# Altium PCB Therm_Expand_PCB.PcbDoc (part 1 of 2)
Units mm, origin at the board's own origin, x right, y up, seen from the top; angles counter-clockwise.
Board outline 68.45 x 50.23 mm, 2 copper layers (Top Layer, Bottom Layer); 54 components, 69 nets, 242 pads, 159 vias.
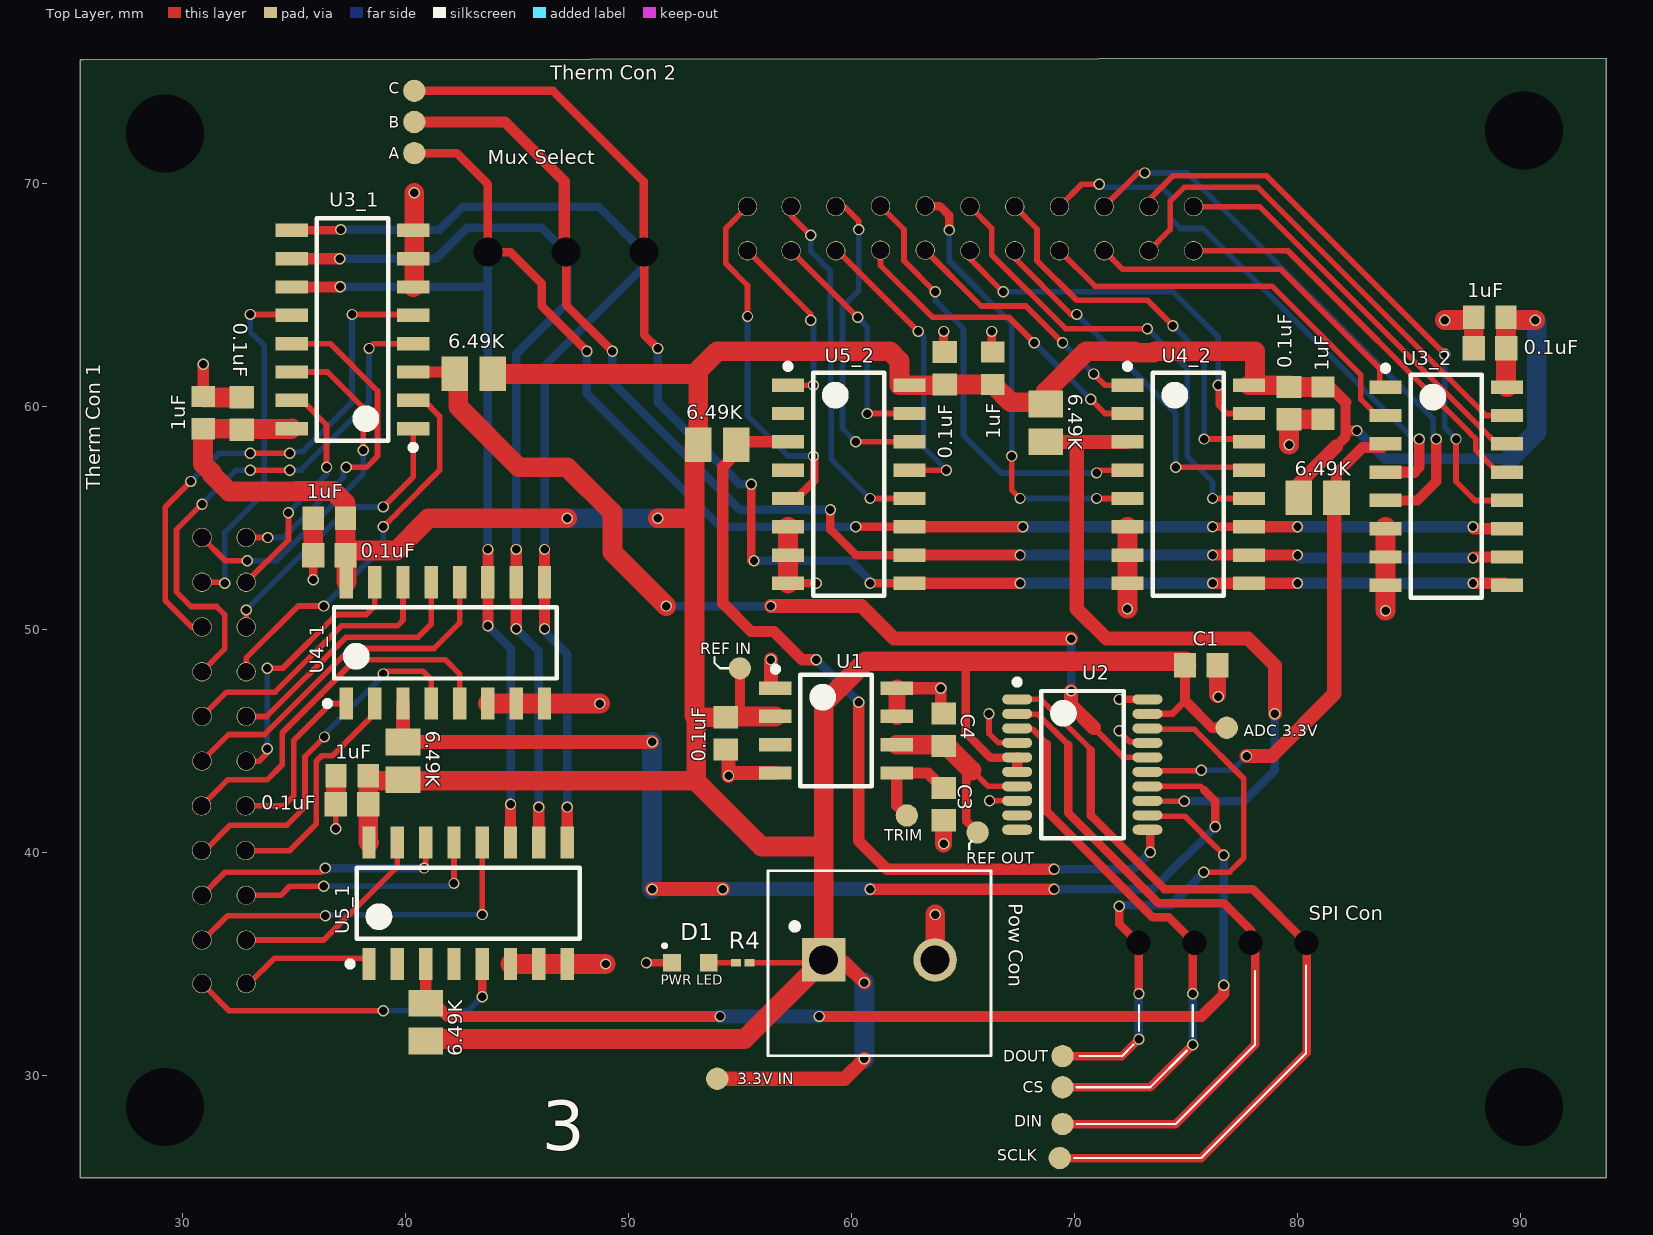
[diagram p0: Top Layer view]
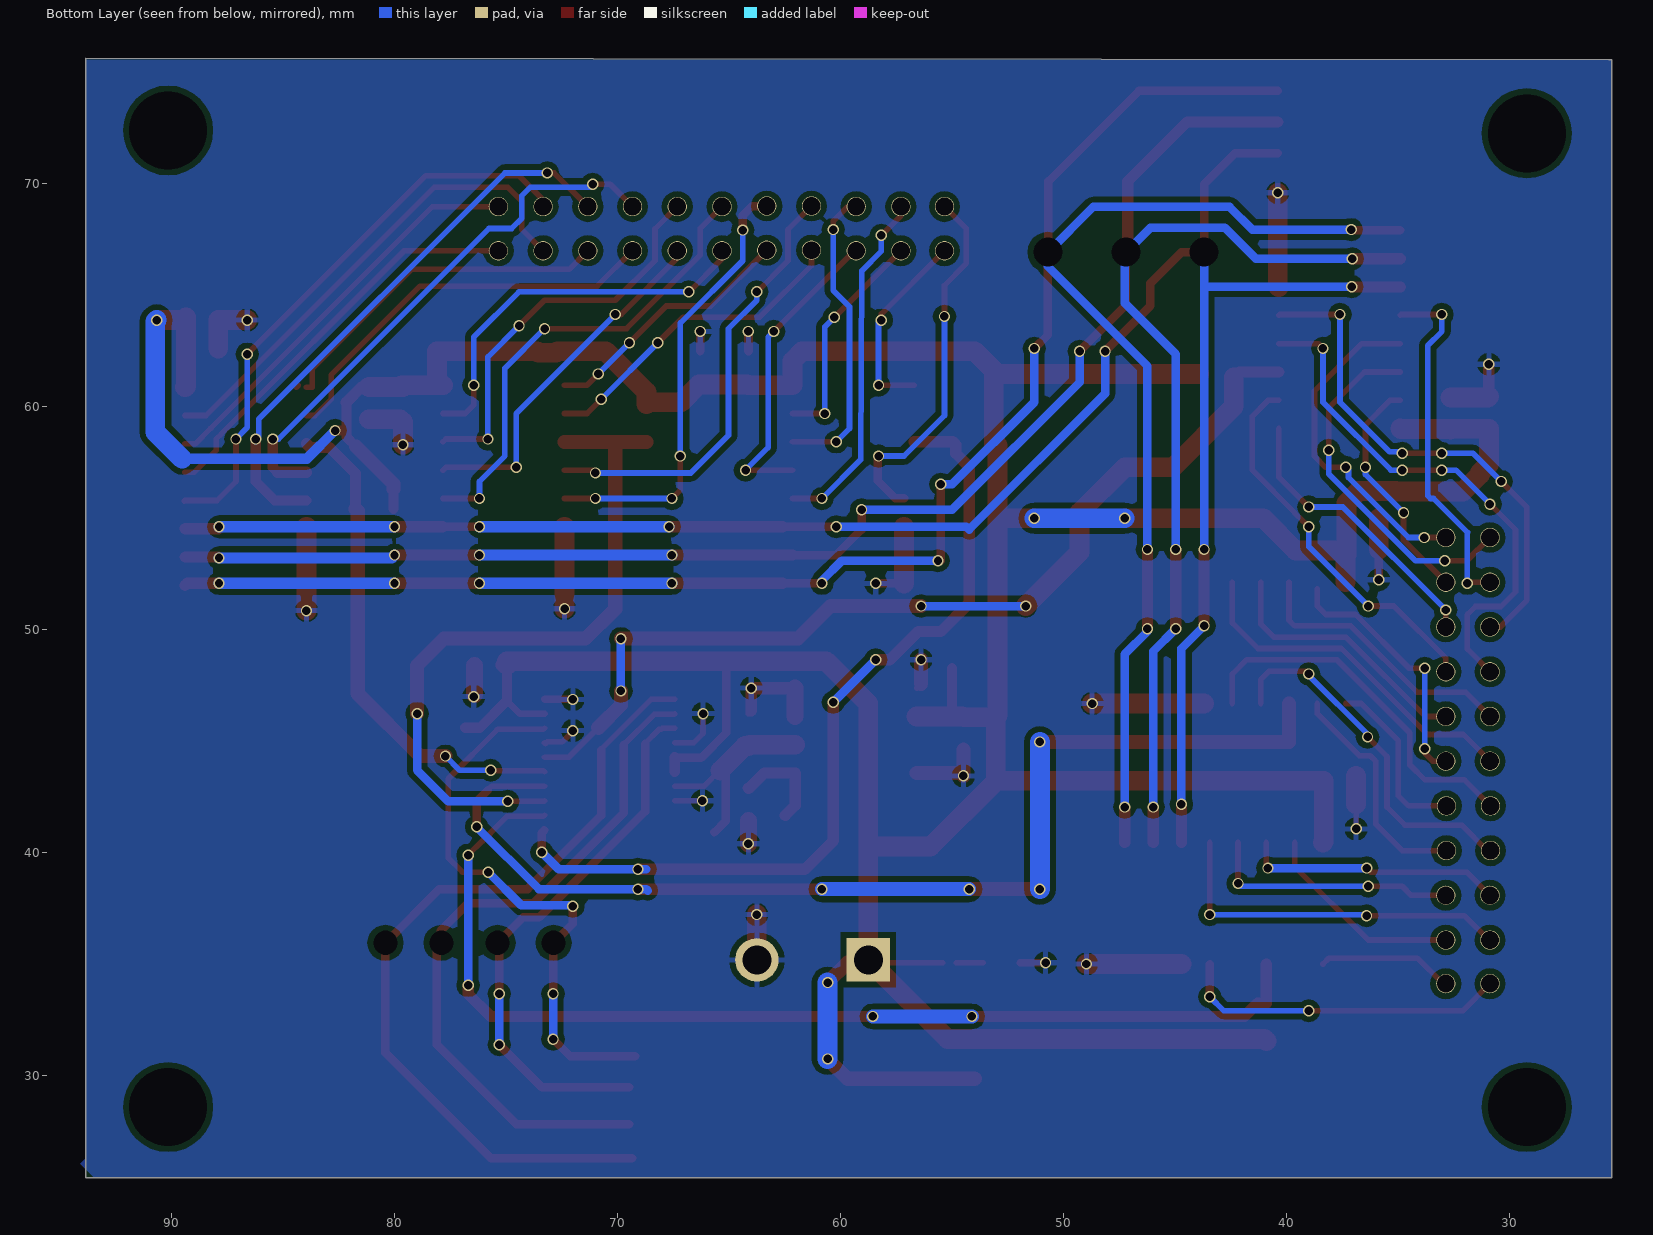
[diagram p1: Bottom Layer view, seen from below]

## Layer stack, top to bottom
Top Solder: solder mask 0.0102, Solder Resist, Dk 3.5
Top Layer: signal copper 0.0356
Dielectric 1: dielectric 0.32, FR-4, Dk 4.8
Bottom Layer: signal copper 0.0356
Bottom Solder: solder mask 0.0102, Solder Resist, Dk 3.5

## Board outline
25.527,75.565 93.853,75.629 93.853,25.4 25.4,25.4 25.4,75.565 25.527,75.565 25.4,75.565

## Design rules (kind name [scope] priority, off if disabled: settings)
Clearance [All] p1: gap=0.254 ignorepadtopadclearanceinfootprint=FALSE except(0: Arc-Hole Track-Hole SMDPad-Hole THPad-Hole Via-Hole Fill-Hole Poly-Hole Region-Hole Text-Hole; 0.127: SMDPad-SMDPad)
PolygonConnect [All] p1: connectstyle=Relief reliefconductorwidth=0.254 reliefentries=4 polygonreliefangle="90 Angle" airgapwidth=0.254
RoutingVias [All] p1: holewidth=0.381 width=0.508 viastyle="Through Hole" minholewidth=0.305 minwidth=0.457 maxholewidth=0.711 maxwidth=0.813
SolderMaskExpansion [All] p1: expansion=0.102
Width [All] p1: maxlimit=1.27 minlimit=0.152 preferedwidth=0.381 minimp=50.000000 maximp=50.000000 favimp=50.000000
30 further rules are at their usual default settings.

## Classes and differential pairs
net class ADC_OUTC[1..2]: ADC_OUTC1 ADC_OUTC2
net class ADC_OUTB[1..2]: ADC_OUTB1 ADC_OUTB2
channel class Multiplexers: Data_TransferA_U_Single_Mux1 Data_TransferB_U_Single_Mux2
channel class MID: Data_Transfer1 Data_Transfer2
channel class 50Pin_Connector: Data_TransferA_U_AHK50H-ND_THERM_CONNECTOR1 Data_TransferB_U_AHK50H-ND_THERM_CONNECTOR2
net class ADC_OUTA[1..2]: ADC_OUTA1 ADC_OUTA2
component class Data_TransferB_U_Single_Mux2: C5_2 C6_2 C7_2 C8_2 C9_2 C10_2 R1_2 R2_2 R3_2 TP11 U3_2 U4_2 U5_2
component class Data_TransferA_U_Single_Mux1: A B C C5_1 C6_1 C7_1 C8_1 C9_1 C10_1 "Mux Select" R1_1 R2_1 R3_1 U3_1 U4_1 U5_1
component class U_Data_Conversion: 0.1uF "3.3V IN" "ADC 3.3V" C1 C3 C4 CS D1 DIN DOUT "Pow Con" R4 "REF IN" "REF OUT" S1 S2 S3 S4 SCLK "SPI Con" TRIM U1 U2
component class Data_TransferB_U_AHK50H-ND_THERM_CONNECTOR2: "Therm Con 2"
component class Data_TransferA_U_AHK50H-ND_THERM_CONNECTOR1: "Therm Con 1"

## Components (designator, comment, footprint, x,y, rotation, side; value= is the part's Value field where it differs from the comment)
0.1uF "0.1uF" 0.1UF_KEMET 64.186,61.722 r270 top (schematic designator C9)
0.1uF "0.1uF" 0.1UF_KEMET 37.592,42.164 r0 top (schematic designator C9)
0.1uF "0.1uF" 0.1UF_KEMET 79.629,60.159 r90 top (schematic designator C7)
0.1uF "0.1uF" 0.1UF_KEMET 36.576,53.34 r0 top (schematic designator C7)
0.1uF "0.1uF" 0.1UF_KEMET 88.646,62.611 r0 top (schematic designator C5)
0.1uF "0.1uF" 0.1UF_KEMET 32.639,59.69 r270 top (schematic designator C5)
0.1uF "0.1uF Cap" 0.1UF_KEMET 54.356,45.339 r90 top (schematic designator C2)
1uF "1uF" 1UF_SAMSUNG 66.345,61.722 r270 top (schematic designator C10)
1uF "1uF" 1UF_SAMSUNG 37.592,43.434 r0 top (schematic designator C10)
1uF "1uF" 1UF_SAMSUNG 81.153,60.159 r90 top (schematic designator C8)
1uF "1uF" 1UF_SAMSUNG 36.576,54.991 r0 top (schematic designator C8)
1uF "1uF" 1UF_SAMSUNG 88.646,64.008 r0 top (schematic designator C6)
1uF "1uF" 1UF_SAMSUNG 30.912,59.729 r270 top (schematic designator C6)
"3.3V IN" "Test Point" "TEST POINT"#1 111.125,27.686 r90 top locked (schematic designator TP9)
6.49K "6.49kOhm SMD Resistor" RESC2012X06N 53.975,58.293 r180 top (schematic designator R3)
6.49K "6.49kOhm SMD Resistor" RESC2012X06N 40.894,32.385 r270 top (schematic designator R3)
6.49K "6.49kOhm SMD Resistor" RESC2012X06N 68.707,59.27 r90 top (schematic designator R2)
6.49K "6.49kOhm SMD Resistor" RESC2012X06N 39.878,44.108 r270 top (schematic designator R2)
6.49K "6.49kOhm SMD Resistor" RESC2012X06N 80.911,55.919 r180 top (schematic designator R1)
6.49K "6.49kOhm SMD Resistor" RESC2012X06N 43.053,61.468 r0 top (schematic designator R1)
A "Test Point" "TEST POINT"#2 153.67,33.02 r90 top locked (schematic designator TP15)
"ADC 3.3V" "Test Point" "TEST POINT"#3 122.809,27.686 r90 top locked (schematic designator TP7)
B "Test Point" "TEST POINT"#2 144.272,33.401 r90 top locked (schematic designator TP14)
C "Test Point" "TEST POINT"#2 134.366,33.02 r90 top (schematic designator TP13)
C1 "0.1uF Cap" 0.1UF_KEMET 75.692,48.387 r180 top
C3 "0.1uF Cap" 0.1UF_KEMET 64.135,42.164 r270 top
C4 "0.1uF Cap" 0.1UF_KEMET 64.135,45.503 r270 top
CS "Test Point" "TEST POINT"#4 152.019,27.686 r90 top locked (schematic designator TP2)
D1 "LED" GREEN_SMD_LED 43.155,36.678 r0 top
DIN "Test Point" "TEST POINT"#5 146.177,27.686 r90 top locked (schematic designator TP3)
DOUT "Test Point" "TEST POINT"#6 157.861,27.686 r90 top locked (schematic designator TP1)
"Mux Select" "Mux_Sel" 3-SCREW-TERMINAL-MUX-SELECT 51.562,66.396 r180 top (schematic designator P4)
"Pow Con" "PCB_Power_Connector" POWER_CONNECTOR 38.394,32.258 r0 top (schematic designator P1)
R4 "Green_LED_Res" GREEN_LED_RES 55.118,35.052 r180 top
"REF IN" "Test Point" "TEST POINT"#7 140.335,27.686 r90 top locked (schematic designator TP5)
"REF OUT" "Test Point" "TEST POINT"#8 128.651,27.686 r90 top locked (schematic designator TP6)
S1 "#6-32 Standoff" "#6-32 STAND OFF" 100.432,103.048 r0 top
S2 "#6-32 Standoff" "#6-32 STAND OFF" 39.472,102.921 r0 top
S3 "#6-32 Standoff" "#6-32 STAND OFF" 39.472,59.233 r0 top
S4 "#6-32 Standoff" "#6-32 STAND OFF" 100.432,59.233 r0 top
SCLK "Test Point" "TEST POINT"#9 134.493,27.686 r90 top locked (schematic designator TP4)
"SPI Con" "2.54MM MUX SEL CON" "4POS 2.54MM HEADER MUX SEL" 80.518,34.036 r180 top (schematic designator P3)
"Therm Con 1" "22-Pin-Connector" "22-PIN CONENCTOR" 375.336,384.759 r90 top (schematic designator P2)
"Therm Con 2" "22-Pin-Connector" "22-PIN CONENCTOR" 405.982,-275.499 r0 top (schematic designator P2)
TP19 "Test Point" "TEST POINT"#10 80.645,39.878 r90 top locked
TRIM "Test Point" "TEST POINT"#11 116.967,27.686 r90 top locked (schematic designator TP8)
U1 "8Pin_ADC_REF_V" SOIC127P600X175-8N 59.309,45.466 r0 top
U2 "8Bit-ADC" 8BIT-8CH-SAR-ADC 70.358,43.942 r0 top
U3_1 "8:1 - MUX" SOP127P600X175 37.61,63.461 r180 top (schematic designator U3)
U3_2 "8:1 - MUX" SOP127P600X175 86.684,56.427 r0 top (schematic designator U3)
U4_1 "8:1 - MUX" SOP127P600X175 41.783,49.403 r90 top (schematic designator U4)
U4_2 "8:1 - MUX" SOP127P600X175 75.108,56.515 r0 top (schematic designator U4)
U5_1 "8:1 - MUX" SOP127P600X175 42.799,37.719 r90 top (schematic designator U5)
U5_2 "8:1 - MUX" SOP127P600X175 59.875,56.515 r0 top (schematic designator U5)

## Footprints (in the part's own frame and the unit in brackets; to place one, negate y for a bottom-side part, rotate by r counter-clockwise, add the part's x,y. Pads: shape width x height; smd on the part's side, far side on the other; paste and mask are expansions set on the pad)
0.1UF_KEMET [mm]
  rect 1x1.1 smd: 1(-0.725,0) 2(0.725,0)
  body extent -0.87,-0.48 0.87,0.48, height 0.92
1UF_SAMSUNG [mm]
  rect 0.95x1.05 smd: 1(-0.725,0) 2(0.725,0)
  body extent -0.85,-0.45 0.85,0.45, height 0.9
3-SCREW-TERMINAL-MUX-SELECT [mm]
  round 0.8 hole 1.3: 1(0.864,-0.533) 2(4.369,-0.533) 3(7.874,-0.533)
  body extent -1.43,-4.08 10.07,2.92, height 8.5
"4POS 2.54MM HEADER MUX SEL" [mm]
  round 0.8 hole 1.09: 1(0.102,-1.905) 2(2.616,-1.905) 3(5.131,-1.905) 4(7.645,-1.905)
  body extent -2.44,-2.64 10.26,10.95, height 7.06
8BIT-8CH-SAR-ADC [mm]
  oval 1.35x0.45 smd: 1(-2.925,2.925) 2(-2.925,2.275) 3(-2.925,1.625) 4(-2.925,0.975) 5(-2.925,0.325) 6(-2.925,-0.325) 7(-2.925,-0.975) 8(-2.925,-1.625) 9(-2.925,-2.275) 10(-2.925,-2.925) 11(2.925,-2.925) 12(2.925,-2.275) 13(2.925,-1.625) 14(2.925,-0.975) 15(2.925,-0.325) 16(2.925,0.325) 17(2.925,0.975) 18(2.925,1.625) 19(2.925,2.275) 20(2.925,2.925)
  silkscreen extent -3.05,-3.3 1.85,3.82, body extent -3.2,-3.3 3.2,3.3, height 1.25
"22-PIN CONENCTOR" [mil]
  round 34 hole 31.5: 1(-13017,13484) 2(-13017,13562) 3(-13096,13484) 4(-13096,13562) 5(-13175,13484) 6(-13175,13562) 7(-13254,13484) 8(-13254,13562) 9(-13333,13484) 10(-13333,13562) 11(-13412,13484) 12(-13412,13562) 13(-13491,13485) 14(-13491,13563) 15(-13570,13485) 16(-13570,13563) 17(-13649,13484) 18(-13649,13562) 19(-13728,13484) 20(-13728,13562) 22(-13805,13562) 51(-13805,13484)
  body extent -13883,13472 -12939,13866, height 199
"#6-32 STAND OFF" [mm]
  round 0.8 hole 3.5: 1(-10.262,-30.658)
  body extent -13.92,-33.83 -6.6,-27.48, height 10.32
GREEN_LED_RES [mm] "Chip Resistor, 2-Leads, Body 0.60x0.30mm, IPC Medium Density"
  rect 0.45x0.35 smd: 1(-0.3,0) 2(0.3,0)
  body extent -0.32,-0.17 0.32,0.17, height 0.26
GREEN_SMD_LED [mm]
  rect 0.8x0.8 smd: 1(8.788,-1.626) 2(10.439,-1.626)
  silkscreen extent 8.43,-0.89 8.48,-0.84, body extent 8.79,-2.02 10.41,-1.23, height 0.71
POWER_CONNECTOR [mm]
  rect 1.95x1.95 hole 1.3: 1(20.36,2.921)
  round 1.95 hole 1.3: 2(25.36,2.921)
  silkscreen extent 17.86,-1.38 27.86,6.92, body extent 17.89,-2.13 28.29,6.87, height 11.41
RESC2012X06N [mm] "Chip Resistor, 2-Leads, Body 2.00x1.25mm, IPC Medium Density"
  rect 1.2x1.55 smd: 1(-0.85,0) 2(0.85,0)
  body extent -1.1,-0.58 1.1,0.58, height 0.6
SOIC127P600X175-8N [mm] "SOIC, 8-Leads, Body 4.90x3.90mm, Pitch 1.27mm, IPC Medium Density"
  rect 1.45x0.6 smd: 1(-2.725,1.905) 2(-2.725,0.635) 3(-2.725,-0.635) 4(-2.725,-1.905) 5(2.725,-1.905) 6(2.725,-0.635) 7(2.725,0.635) 8(2.725,1.905)
  silkscreen extent -2.85,-2.5 1.6,2.88, body extent -3,-2.5 3,2.5, height 1.75
SOP127P600X175 [mm] "SOP, 16-Leads, Body 9.90x3.90mm, Pitch 1.27mm, IPC Medium Density"
  rect 1.45x0.6 smd: 1(-2.725,4.445) 2(-2.725,3.175) 3(-2.725,1.905) 4(-2.725,0.635) 5(-2.725,-0.635) 6(-2.725,-1.905) 7(-2.725,-3.175) 8(-2.725,-4.445) 9(2.725,-4.445) 10(2.725,-3.175) 11(2.725,-1.905) 12(2.725,-0.635) 13(2.725,0.635) 14(2.725,1.905) 15(2.725,3.175) 16(2.725,4.445)
  silkscreen extent -2.85,-5 1.6,5.42, body extent -3,-5 3,5, height 1.75
"TEST POINT"#1 [mm]
  round 1 smd: 1(2.159,57.15)
"TEST POINT"#2 [mm]
"TEST POINT"#3 [mm]
  round 1 smd: 1(17.907,45.974)
"TEST POINT"#4 [mm]
  round 1 smd: 1(1.778,82.55)
"TEST POINT"#5 [mm]
  round 1 smd: 1(0.127,76.708)
"TEST POINT"#6 [mm]
  round 1 smd: 1(3.175,88.392)
"TEST POINT"#7 [mm]
  round 1 smd: 1(20.574,85.344)
"TEST POINT"#8 [mm]
  round 1 smd: 1(13.208,62.992)
"TEST POINT"#9 [mm]
  round 1 smd: 1(-1.397,65.151)
"TEST POINT"#10 [mm]
  round 1 on Top Solder: 1(0,0)
"TEST POINT"#11 [mm]
  round 1 smd: 1(13.97,54.483)

## Part data
0.1uF 0.1uF 0.1uF 0.1uF 0.1uF 0.1uF: library part "0.1uF Cap", "C0603C101K8GAC7867 Kemet Capacitor", Supplier Part Number 1=399-14477-1-ND, Supplier 1=Digi-Key
0.1uF C1 C3 C4: "C0603C101K8GAC7867 Kemet Capacitor", Supplier Part Number 1=399-14477-1-ND, Supplier 1=Digi-Key
1uF 1uF 1uF 1uF 1uF 1uF: library part "1uF Samsung Cap", "1uF Samsung Cap", Supplier Part Number 1=1276-1946-1-ND, Supplier 1=Digi-Key
6.49K 6.49K 6.49K 6.49K 6.49K 6.49K: Case/Package=0805, Case Code (Metric)=2012, Manufacturer=Panasonic, Manufacturer Part Number=ERA6AEB6491V, Max Operating Temperature=155°C, Max Power Dissipation=125mW, Min Operating Temperature=-55°C, Package Quantity=1, Resistance=6.49K, Supplier Part Number 1=P6.49KDACT-ND, Temperature Coefficient=25ppm/°C, Tolerance=0.1%, Voltage Rating=100V, Case Code (Imperial)=0805, ComponentLink1Description=http://www.farnell.com/datasheets/485442.pdf?src-supplier=Farnell, ComponentLink1URL=http://www.farnell.com/datasheets/485442.pdf?src-supplier=Farnell, ComponentLink2Description=http://www.mouser.com/ds/2/315/AOA0000CE26-32660.pdf?src-supplier=Mouser, ComponentLink2URL=http://www.mouser.com/ds/2/315/AOA0000CE26-32660.pdf?src-supplier=Mouser, ComponentLink3Description=http://www.farnell.com/datasheets/2059650.pdf?src-supplier=Farnell, ComponentLink3URL=http://www.farnell.com/datasheets/2059650.pdf?src-supplier=Farnell, ComponentLink4Description=http://uk.rs-online.com/webdocs/0eb1/0900766b80eb1d8c.pdf?src-supplier=RSComponents, ComponentLink4URL=http://uk.rs-online.com/webdocs/0eb1/0900766b80eb1d8c.pdf?src-supplier=RSComponents, ComponentLink5Description=http://www.farnell.com/datasheets/485442.pdf?src-supplier=Element14, ComponentLink5URL=http://www.farnell.com/datasheets/485442.pdf?src-supplier=Element14, ComponentLink6Description=http://www.produktinfo.conrad.com/datenblaetter/1100000-1199999/001181295-da-01-en-WIDERSTAND_ERA_0805_6K49_0_1__5000ST.pdf?src-supplier=Conrad, ComponentLink6URL=http://www.produktinfo.conrad.com/datenblaetter/1100000-1199999/001181295-da-01-en-WIDERSTAND_ERA_0805_6K49_0_1__5000ST.pdf?src-supplier=Conrad, Composition="Thin Film,Metal Film", Contact Plating=Tin, Depth=1.25mm, Features="Automotive AEC-Q200", Height=0.5mm, Lead Free="Lead Free", Length=2mm, Military Standard=Not, Mount="Surface Mount", Number of Pins=2, Number of Terminations=2, Packaging="Tape and Reel", Power Rating=125mW, Pricing 1="1=0.36, 10=0.302, 100=0.1182, 1000=0.0495, 2500=0.0454 (USD)", Radiation Hardening=No, REACH SVHC="No SVHC", Stock 1=15147, Supplier 1=Digi-Key, Termination=SMD/SMT, Voltage Rating (DC)=100V, Width=1.25mm
D1: library part GREEN_LED, Case/Package=0603, Case Code (Metric)=1608, Color=Green, Forward Current=20mA, Forward Voltage=2V, Lens Color=Colorless,Clear, Manufacturer=Dialight, Manufacturer Part Number=5988070107F, Max Operating Temperature=100°C, Min Operating Temperature=-30°C, Package Quantity=4000, Power Dissipation=60mW, Reverse Voltage=5V, Supplier Part Number 1=350-2035-1-ND, Case Code (Imperial)=0603, ComponentLink1Description=http://www.mouser.com/ds/2/109/SMT_selector_guide-267443.pdf?src-supplier=Mouser, ComponentLink1URL=http://www.mouser.com/ds/2/109/SMT_selector_guide-267443.pdf?src-supplier=Mouser, ComponentLink2Description=http://uk.rs-online.com/webdocs/0ae2/0900766b80ae2975.pdf?src-supplier=RSComponents, ComponentLink2URL=http://uk.rs-online.com/webdocs/0ae2/0900766b80ae2975.pdf?src-supplier=RSComponents, ComponentLink3Description=http://www.farnell.com/datasheets/1720200.pdf?src-supplier=Element14, ComponentLink3URL=http://www.farnell.com/datasheets/1720200.pdf?src-supplier=Element14, ComponentLink4Description=https://media.digikey.com/pdf/Data%20Sheets/Dialight%20PDFs/598_Series_0603_Pkg.pdf?src-supplier=Digi-Key, ComponentLink4URL=https://media.digikey.com/pdf/Data%20Sheets/Dialight%20PDFs/598_Series_0603_Pkg.pdf?src-supplier=Digi-Key, ComponentLink5Description=http://www.farnell.com/datasheets/1484480.pdf?src-supplier=Element14, ComponentLink5URL=http://www.farnell.com/datasheets/1484480.pdf?src-supplier=Element14, ComponentLink6Description=https://www.alliedelec.com/m/d/745256ca487aea7b70ea31e2d673d5bb.pdf?src-supplier=Allied+Electronics, ComponentLink6URL=https://www.alliedelec.com/m/d/745256ca487aea7b70ea31e2d673d5bb.pdf?src-supplier=Allied+Electronics, ComponentLink7Description=http://www.onlinecomponents.com/productFiles/mf-DIA/mdei5980603.pdf?src-supplier=Onlinecomponents.com, ComponentLink7URL=http://www.onlinecomponents.com/productFiles/mf-DIA/mdei5980603.pdf?src-supplier=Onlinecomponents.com, ComponentLink8Description=https://www.verical.com/server-webapp/html/getDatasheet?partID=146438&src-supplier=Verical, ComponentLink8URL=https://www.verical.com/server-webapp/html/getDatasheet?partID=146438&src-supplier=Verical, ComponentLink9Description=http://www.dialight.com/Assets/Brochures_And_Catalogs/Indication/SMT_selector_guide.pdf?src-supplier=Future+Electronics, ComponentLink9URL=http://www.dialight.com/Assets/Brochures_And_Catalogs/Indication/SMT_selector_guide.pdf?src-supplier=Future+Electronics, Depth=0.8mm, Dominant Wavelength=568nm, Height=0.7mm, Illumination Color=Green, Lead Free="Lead Free", Length=1.6mm, Lens Size=0.8mm, Lens Style=Flat,Rectangular,Diffused,Colorless,Clear, Lens Transparency=Clear, Luminous Intensity=20mcd, Mount="Surface Mount", Number of Elements=1, Number of LEDs=1, Number of Pins=2, Packaging="Tape and Reel", Pricing 1="1=0.46, 10=0.33, 25=0.2528, 100=0.1648, 250=0.1209, 500=0.1026, 1000=0.0843 (USD)", Radiation Hardening=No, REACH SVHC="No SVHC", Stock 1=228546, Supplier 1=Digi-Key, Test Current=20mA, Viewing Angle=140°, Wavelength=570nm, Width=0.8mm
"Mux Select": library part 3-Screw-Terminal-Mux-Select, "Mux Select", Color=Blue, Current Rating=10A, Manufacturer="Wurth Electronics", Manufacturer Part Number=691103110003, Supplier Part Number 1=732-2746-ND, Voltage Rating=125V, ComponentLink1Description=http://www.farnell.com/datasheets/1442217.pdf?src-supplier=Element14, ComponentLink1URL=http://www.farnell.com/datasheets/1442217.pdf?src-supplier=Element14, Contact Material=Brass, Height=12.2mm, Housing Material=Nylon, Length=7mm, Number of Contacts=3, Number of Levels=1, Number of Positions Per Level=3, Pitch=0.138inch, Pricing 1="1=1.1, 10=0.986, 50=0.851, 100=0.762, 500=0.717, 980=0.672 (USD)", REACH SVHC=Unknown, Stock 1=617, Stripping Length=-6mm, Supplier 1=Digi-Key, Termination=Screw, Width=11.5mm, Wire/Cable Gauge=26AWG
"Pow Con": Color=Green, Current=18A, Current Rating=17.5A, Flammability Rating="UL94 V-0", Manufacturer="Phoenix Contact", Manufacturer Part Number=PT1,5/2-5.0-H, Max Current Rating=16A, Max Supply Voltage=250V, Package Quantity=250, Supplier Part Number 1=277-1667-ND, Voltage=300V, Voltage Rating (DC)=320V, Approvals=UL, ComponentLink1Description=https://media.digikey.com/pdf/Data%20Sheets/Phoenix%20Contact%20PDFs/1935161.pdf, ComponentLink1URL=https://media.digikey.com/pdf/Data%20Sheets/Phoenix%20Contact%20PDFs/1935161.pdf, ComponentLink2Description=https://www.verical.com/server-webapp/html/getDatasheet?partID=177903, ComponentLink2URL=https://www.verical.com/server-webapp/html/getDatasheet?partID=177903, Connector Type=Screw, Contact Material=Copper,Tin, Depth=9mm, Height=11.3mm, Housing Color=Green, Housing Material=Polyamide, Insulation Material=Nylon, Lead Free="Lead Free", Length=9mm, Material=Nylon, Mount="Through Hole", Number of Circuits=2, Number of Contacts=2, Number of Levels=1, Number of Pins=2, Number of Poles=2, Number of Positions=2, Number of Positions Per Level=2, Number of Rows=1, Orientation=Straight, Packaging=Bulk, Pitch=5mm, Pricing 1="1=0.43, 10=0.411, 50=0.3928, 100=0.382, 250=0.357, 500=0.3284, 1000=0.3035 (USD)", Radiation Hardening=No, Stock 1=104404, Supplier 1=Digi-Key, Termination=Solder, Voltage Rating=250V, Weight=0.067021oz, Width=14.9mm, Wire/Cable Gauge=14AWG, Wire Gauge (Max)=26AWG, Wire Gauge (Min)=12AWG
R4: Case/Package=0201, Case Code (Metric)=0603, Manufacturer=Panasonic, Manufacturer Part Number=ERJ-1GNF90R9C, Max Operating Temperature=125°C, Max Power Dissipation=50mW, Min Operating Temperature=-55°C, Package Quantity=15000, Resistance=90.9R, Supplier Part Number 1=P123198CT-ND, Temperature Coefficient=200ppm/°C, Tolerance=1%, Voltage Rating=25V, Case Code (Imperial)=0201, Composition="Thick Film", Contact Plating=Tin,Matte, Height=0.01inch, Length=0.024inch, Mount="Surface Mount", Number of Terminations=2, Packaging="Tape and Reel", Power Rating=50mW, Pricing 1="1=0.1, 10=0.058, 100=0.0235, 1000=0.0105, 2500=0.0092, 5000=0.0076 (USD)", Radiation Hardening=No, Stock 1=52857, Supplier 1=Digi-Key, Termination=SMD/SMT, Width=0.3mm
S1 S2 S3 S4: Manufacturer=RAF, Manufacturer Part Number=2102T-632-AL-7, Package Quantity=100, Supplier Part Number 1=1772-1144-ND, Pricing 1="1=0.5, 25=0.3328, 100=0.2834, 250=0.2692, 500=0.2551, 1000=0.2409 (USD)", Stock 1=1687, Supplier 1=Digi-Key
"SPI Con": Color=Black, Contact Resistance=30mR, Current Rating=3A, Flammability Rating="UL94 V-0", Insulation Resistance=1GR, Manufacturer=Molex, Manufacturer Part Number=0705530108, Max Operating Temperature=105°C, Min Operating Temperature=-40°C, Package Quantity=1680, Supplier Part Number 1=WM4155-ND, Voltage Rating=250V, ComponentLink1Description=https://www.molex.com/pdm_docs/ps/PS-70400.pdf?src-supplier=Digi-Key, ComponentLink1URL=https://www.molex.com/pdm_docs/ps/PS-70400.pdf?src-supplier=Digi-Key, ComponentLink2Description=http://www.molex.com/webdocs/datasheets/pdf/en-us/0705530108_PCB_HEADERS.pdf?src-supplier=Avnet+Asia, ComponentLink2URL=http://www.molex.com/webdocs/datasheets/pdf/en-us/0705530108_PCB_HEADERS.pdf?src-supplier=Avnet+Asia, ComponentLink3Description=http://www.farnell.com/datasheets/2027073.pdf?src-supplier=Element14, ComponentLink3URL=http://www.farnell.com/datasheets/2027073.pdf?src-supplier=Element14, ComponentLink4Description=http://www.molex.com/webdocs/datasheets/pdf/en-us/0705530108_PCB_HEADERS.pdf?src-supplier=Avnet, ComponentLink4URL=http://www.molex.com/webdocs/datasheets/pdf/en-us/0705530108_PCB_HEADERS.pdf?src-supplier=Avnet, ComponentLink5Description=http://www.mouser.com/ds/2/276/0705530108_PCB_HEADERS-172949.pdf?src-supplier=Mouser, ComponentLink5URL=http://www.mouser.com/ds/2/276/0705530108_PCB_HEADERS-172949.pdf?src-supplier=Mouser, Connector Type="Male Pin", Contact Material=Bronze, Contact Mating Length=0.24inch, Contact Plating=Gold, Depth=13.59mm, ELV=Compliant, Fastening Type=Latch, Gender=Male, Glow Wire Compliant=Non-compliant, Housing Color=Black, Housing Material=Polyester, Length=12.71mm, Material=Brass, Mount="Through Hole", Number of Circuits=4, Number of Contacts=4, Number of Positions=4, Number of Rows=1, Orientation="Right Angle", Packaging=Rail/Tube, Pitch=0.1inch, Pricing 1="1=2.03, 10=1.838, 100=1.575, 500=1.3125, 1680=1.0875, 5040=0.9975, 10080=0.975 (USD)", Radiation Hardening=No, REACH SVHC=Unknown, Stock 1=1281, Supplier 1=Digi-Key, Termination=Solder, Voltage Rating (DC)=250V
"Therm Con 1" "Therm Con 2": Color=Black, Contact Resistance=30mR, Current Rating=2A, Manufacturer=Hirose, Manufacturer Part Number=DF11-22DP-2DS(24), Max Operating Temperature=85°C, Min Operating Temperature=-30°C, Package Quantity=20, Supplier Part Number 1=H10253-ND, Voltage Rating=250V, ComponentLink1Description=http://docs-usa.electrocomponents.com/techlib:/itc_doclist_US.htm?stockno=6888963&src-supplier=Allied+Electronics, ComponentLink1URL=http://docs-usa.electrocomponents.com/techlib:/itc_doclist_US.htm?stockno=6888963&src-supplier=Allied+Electronics, ComponentLink2Description=https://www.verical.com/server-webapp/html/getDatasheet?partID=456315&src-supplier=Verical, ComponentLink2URL=https://www.verical.com/server-webapp/html/getDatasheet?partID=456315&src-supplier=Verical, ComponentLink3Description=http://www.hirose.co.jp/cataloge_hp/en_DF11_20130411.pdf?src-supplier=Future+Electronics, ComponentLink3URL=http://www.hirose.co.jp/cataloge_hp/en_DF11_20130411.pdf?src-supplier=Future+Electronics, ComponentLink4Description=http://www.farnell.com/datasheets/91550.pdf?src-supplier=Element14, ComponentLink4URL=http://www.farnell.com/datasheets/91550.pdf?src-supplier=Element14, ComponentLink5Description=http://www.mouser.com/ds/2/185/DF11_catalog-1064296.pdf?src-supplier=Mouser, ComponentLink5URL=http://www.mouser.com/ds/2/185/DF11_catalog-1064296.pdf?src-supplier=Mouser, ComponentLink6Description=http://documents.rs-components.com/techlib://itc_doclist_GB.htm?stockno=6056598&src-supplier=RSComponents, ComponentLink6URL=http://documents.rs-components.com/techlib://itc_doclist_GB.htm?stockno=6056598&src-supplier=RSComponents, Connector Type="Male Pin", Contact Material="Brass,Copper Alloy,Tin", Contact Mating Length=0.118inch, Contact Plating=Tin, Depth=10mm, Fastening Type=Detent, Gender=Male, Height=5mm, Housing Color=Black, Housing Material=Polyamide, Lead Free="Lead Free", Length=24mm, Max Current Rating=2A, Mount="Through Hole", Number of Contacts=22, Number of Positions=22, Number of Rows=2, Orientation="Right Angle", Packaging=Rail/Tube, Pitch=2mm, Pricing 1="1=1.19, 20=1.0455, 100=0.902, 500=0.738, 1000=0.656 (USD)", Radiation Hardening=No, Row Spacing=0.079inch, Stock 1=536, Supplier 1=Digi-Key, Termination=Solder
U1: Case/Package=D, Manufacturer="Texas Instruments", Manufacturer Part Number=REF5025AQDRQ1, Max Input Voltage=18V, Max Operating Temperature=125°C, Max Output Current=10mA, Max Output Voltage=2.5V, Min Input Voltage=2.7V, Min Operating Temperature=-40°C, Nominal Supply Current=800uA, Operating Supply Current=1.2mA, Package Quantity=1, Supplier Part Number 1=296-27911-1-ND, Temperature Coefficient=3ppm/°C, Tolerance=0.1%, ComponentLink1Description=http://www.ti.com/lit/ds/symlink/ref5025a-q1.pdf, ComponentLink1URL=http://www.ti.com/lit/ds/symlink/ref5025a-q1.pdf, ComponentLink2Description=http://www.ti.com/lit/ds/symlink/ref5020a-q1.pdf?src-supplier=Digi-Key, ComponentLink2URL=http://www.ti.com/lit/ds/symlink/ref5020a-q1.pdf?src-supplier=Digi-Key, ComponentLink3Description=http://www.ti.com/lit/ds/symlink/ref5030a-q1.pdf?src-supplier=Digi-Key, ComponentLink3URL=http://www.ti.com/lit/ds/symlink/ref5030a-q1.pdf?src-supplier=Digi-Key, Lead Free="Lead Free", Min Output Voltage=2.5V, Number of Channels=1, Number of Pins=8, Output Current=10mA, Output Type=Fixed, Output Voltage=2.5V, Packaging="Tape and Reel", Pricing 1="1=3.54, 10=3.182, 100=2.607, 500=2.2193, 1000=1.8717 (USD)", Quiescent Current=800uA, Radiation Hardening=No, Reference Type=Series, Stock 1=16802, Supplier 1=Digi-Key, Weight=0.002677oz
U2: library part 8Bit-8Ch-SAR-ADC, Case/Package=TSSOP, Input Capacitance=20pF, Manufacturer="Analog Devices", Manufacturer Part Number=AD7908WYRUZ-REEL7, Max Input Voltage=2.525V, Max Operating Temperature=85°C, Max Power Dissipation=13.5mW, Min Input Voltage=2.475V, Min Operating Temperature=-40°C, Package Quantity=1000, Supplier Part Number 1=AD7908WYRUZ-REEL7CT-ND, ComponentLink1Description=http://www.analog.com/media/en/technical-documentation/data-sheets/AD7908_7918_7928.pdf?src-supplier=Digi-Key, ComponentLink1URL=http://www.analog.com/media/en/technical-documentation/data-sheets/AD7908_7918_7928.pdf?src-supplier=Digi-Key, ComponentLink2Description=http://www.produktinfo.conrad.com/datenblaetter/1200000-1299999/001245580-da-01-en-IC_ADC_8B_AD7908WYRUZ_REEL7_TSSOP_20_ADI.pdf?src-supplier=Conrad, ComponentLink2URL=http://www.produktinfo.conrad.com/datenblaetter/1200000-1299999/001245580-da-01-en-IC_ADC_8B_AD7908WYRUZ_REEL7_TSSOP_20_ADI.pdf?src-supplier=Conrad, Interface=SPI, Lead Free="Contains Lead", Number of A/D Converters=1, Number of Bits=8, Number of Channels=8, Number of Inputs=8, Number of Pins=20, Packaging="Tape and Reel", Power Dissipation=13.5mW, Pricing 1="1=5.68, 10=5.1, 100=4.1789 (USD)", Radiation Hardening=No, Resolution=8b, Sampling Rate=1MS/s, Signal to Noise Ratio (SNR)=49dB, Stock 1=1000, Supplier 1=Digi-Key
U3_1 U3_2 U4_1 U4_2 U5_1 U5_2: Case/Package=TSSOP, High Level Output Current=25mA, Manufacturer="Texas Instruments", Manufacturer Part Number=SN74LV4051ATPWRQ1, Max Operating Temperature=105°C, Max Supply Voltage=5.5V, Min Operating Temperature=-40°C, Min Supply Voltage=2V, On-State Resistance=75R, Operating Supply Current=20uA, Package Quantity=1, Supplier Part Number 1=296-19260-1-ND, Bandwidth=35MHz, ComponentLink1Description=http://www.ti.com/lit/ds/symlink/sn74lv4051a-q1.pdf?src-supplier=Digi-Key, ComponentLink1URL=http://www.ti.com/lit/ds/symlink/sn74lv4051a-q1.pdf?src-supplier=Digi-Key, ComponentLink2Description=http://www.ti.com/lit/gpn/sn74lv4051a-q1?src-supplier=Mouser, ComponentLink2URL=http://www.ti.com/lit/gpn/sn74lv4051a-q1?src-supplier=Mouser, ComponentLink3Description=https://www.verical.com/server-webapp/html/getDatasheet?partID=137249&src-supplier=Verical, ComponentLink3URL=https://www.verical.com/server-webapp/html/getDatasheet?partID=137249&src-supplier=Verical, ComponentLink4Description=http://focus.ti.com/lit/ds/symlink/sn74lv4051a-q1.pdf?src-supplier=Avnet, ComponentLink4URL=http://focus.ti.com/lit/ds/symlink/sn74lv4051a-q1.pdf?src-supplier=Avnet, ComponentLink5Description=http://www.produktinfo.conrad.com/datenblaetter/1100000-1199999/001187277-da-01-en-IC_MUX_DE_SN74LV4051ATPWRQ1_TSSOP_16_TID.pdf?src-supplier=Conrad, ComponentLink5URL=http://www.produktinfo.conrad.com/datenblaetter/1100000-1199999/001187277-da-01-en-IC_MUX_DE_SN74LV4051ATPWRQ1_TSSOP_16_TID.pdf?src-supplier=Conrad, Contact Plating=Gold, Lead Free="Lead Free", Logic Function=Multiplexer,Demultiplexer, Low Level Output Current=25mA, Mount="Surface Mount", Number of Bits=8, Number of Channels=1, Number of Circuits=1, Number of Inputs=8, Number of Outputs=1, Number of Pins=16, Packaging="Tape and Reel", Pricing 1="1=0.73, 10=0.646, 100=0.4951, 500=0.3914, 1000=0.3131 (USD)", Propagation Delay=7ns, Radiation Hardening=No, REACH SVHC="No SVHC", Stock 1=41099, Supplier 1=Digi-Key, Supply Type=Single, Turn-Off Delay Time=20ns, Turn-On Delay Time=20ns, Weight=0.002169oz

## Free pads (board coordinates)
  round 1 smd: 2(40.386,71.374) 3(40.386,72.771) 4(40.386,74.168)

## Via types
v1: diameter 0.508, hole 0.381, Top Layer to Bottom Layer, 159 vias

## Nets (pads, with @x,y where several pads share a name; then routed paths per layer and width w, separated by ;. In a path a pad name is that pad's centre, name@x,y a point inside that pad or via, vN(x,y) a via of type N, cw(c..) or ccw(c..) an arc to the next point about the centre after c; other vN are vias at no path point)
+3.3V_AN: 0.1uF.2 1uF.2 6.49K.2 "3.3V IN.1" "ADC 3.3V.1" "Pow Con.1" "REF IN.1" C1.2 R4.1 U1.2 U2.5 U2.6 U2.19 U3_1.16 U3_2.16 U4_1.16 U4_2.16 U5_1.16 U5_2.16 | length 226.8
  Top Layer w0.24: R4.1 58.627,35.052
  Top Layer w0.3: U2.19 74.385,46.217 74.967,46.799
  Top Layer w0.381: 65.024,48.578 65.13,48.472 65.13,45.36 66.242,44.248 U2.5@67.433,44.248
  Top Layer w0.457: 54.991,46.101 54.991,48.26 ; 58.754,35.179 58.627,35.052 59.69,35.052 ; U2.6 67.433,44.248 U2.5 ; C1.2 74.967,46.799 76.173,45.593 76.835,45.593 ; 6.49K.2@80.061,55.411 80.061,55.919 6.49K.2@80.061,56.312 ; 81.741,58.213 82.169,58.642 82.169,58.928 ; 82.169,60.198 82.169,58.928 ; v1(82.677,58.928) 82.169,58.928
  Top Layer w0.508: 1uF.2@81.153,60.884 81.483,60.884 82.169,60.198
  Top Layer w0.635: 53.975,29.845 59.69,29.845 v1(60.579,30.734) ; 59.69,35.052 v1(60.579,34.163) ; C1.2@74.967,48.403 C1.2@75.171,48.403 ; 6.49K.2@80.061,56.312 80.061,56.533 81.741,58.213
  Top Layer w0.889: U3_1.16 34.861,58.991 32.665,58.991 32.639,58.965 32.6,59.004 30.912,59.004 30.912,57.43 31.305,57.037 31.305,56.959 32.067,56.197 35.07,56.197 35.087,56.214 36.75,56.214 37.301,55.663 37.301,54.991 37.301,53.594 37.338,53.557 0.1uF.2@37.338,53.551 ; 0.1uF.2@37.301,53.34 37.301,53.551 0.1uF.2@37.338,53.551 ; U4_1.16 0.1uF.2@37.338,53.551 ; U5_1.16 38.317,40.481 38.317,42.164 38.317,43.219 52.998,43.219 ; 6.49K.2@40.894,31.535 40.982,31.623 55.198,31.623 58.627,35.052 ; 6.49K.2@43.903,61.468 53.125,61.468 ; v1(47.244,54.991) 41.021,54.991 39.581,53.551 0.1uF.2@37.338,53.551 ; v1(51.308,54.991) 52.959,54.991 ; 6.49K.2@52.959,58.254 52.959,54.991 ; 6.49K.2@53.086,58.254 53.125,58.293 53.125,61.468 ; U1.2 54.991,46.101 54.52,46.101 54.483,46.064 54.356,46.064 53.035,46.064 ; 58.754,35.179 58.754,40.259 ; C1.2@74.967,48.403 74.967,48.578 65.024,48.578 60.642,48.578 58.754,46.689 58.754,40.259 ; U4_2.16 U4_2.16@78.105,60.96 ; 0.1uF.2@79.629,60.884 0.1uF.2@79.756,60.884 ; 1uF.2@81.153,60.884 0.1uF.2@79.756,60.884 ; U3_2.16 89.371,60.91 89.371,62.611 89.371,64.008 89.498,63.881 v1(90.678,63.881) ; 52.959,54.991 52.959,46.14 53.035,46.064 ; 52.998,43.219 55.958,40.259 58.754,40.259 ; 52.998,43.219 53.035,43.256 53.035,46.064 ; 53.125,61.468 53.125,61.634 53.975,62.484 61.722,62.484 62.154,62.052 62.154,60.96 64.149,60.96 64.186,60.997 66.345,60.997 67.144,60.198 68.629,60.198 68.707,60.12 68.707,60.656 70.535,62.484 72.694,62.484 72.757,62.42 73.547,62.42 73.61,62.484 78.105,62.484 U4_2.16@78.105,60.96 ; U4_2.16@78.105,60.96 79.68,60.96 0.1uF.2@79.756,60.884
  Bottom Layer w0.457: v1(82.677,58.928) 83.947,57.658 89.535,57.658
  Bottom Layer w0.889: v1(47.244,54.991) v1(51.308,54.991) ; v1(60.579,30.734) v1(60.579,34.163) ; 89.535,57.658 90.742,58.864 90.742,63.817 v1(90.678,63.881)
ADC_OUTA1: 6.49K.1@42.203,61.468 U2.16 U3_1.3 | length 43.7
  Top Layer w0.254: 70.866,45.593 72.192,44.267 U2.16
  Top Layer w0.508: U3_1.3 42.115,61.556 42.203,61.468 6.49K.1@42.355,61.316
  Top Layer w0.635: v1(56.388,51.054) 60.452,51.054 61.912,49.593 v1(69.85,49.593) ; v1(69.85,47.244) 69.85,46.609 70.866,45.593
  Top Layer w0.889: 6.49K.1@42.355,61.316 42.355,60.008 45.085,57.277 47.244,57.277 49.276,55.245 49.276,53.467 v1(51.689,51.054)
  Bottom Layer w0.381: v1(51.689,51.054) v1(56.388,51.054) ; v1(69.85,47.244) v1(69.85,49.593)
ADC_OUTA2: 6.49K.1@81.761,55.919 U2.15 U3_2.3 | length 22.5
  Top Layer w0.254: U2.15 73.327,43.661 75.665,43.661 v1(75.692,43.688)
  Top Layer w0.508: 6.49K.1@81.761,55.411 81.761,55.919 81.761,56.996 82.931,58.166 83.792,58.166 U3_2.3
  Top Layer w0.635: v1(77.724,44.323) 78.867,44.323 81.661,47.117 81.661,55.312 6.49K.1@81.761,55.411
  Bottom Layer w0.254: v1(75.692,43.688) 77.089,43.688 v1(77.724,44.323)
ADC_OUTB1: 6.49K.1@39.878,44.958 U2.14 U4_1.3 | length 50.8
  Top Layer w0.254: U2.14 75.651,42.967 75.819,42.799
  Top Layer w0.381: 75.819,42.799 76.327,42.291 v1(76.327,41.148)
  Top Layer w0.508: v1(60.833,38.354) v1@69.025,38.354
  Top Layer w0.635: U4_1.3 39.878,44.958 v1(51.054,44.958) ; v1(51.054,38.354) v1(54.229,38.354)
  Bottom Layer w0.381: 68.644,38.291 68.707,38.354 v1(69.088,38.354) 73.533,38.354 v1(76.327,41.148)
  Bottom Layer w0.635: v1(54.229,38.354) v1(60.833,38.354)
  Bottom Layer w0.889: v1(51.054,38.354) v1(51.054,44.958)
ADC_OUTB2: 6.49K.1@68.707,58.42 U2.13 U4_2.3 | length 32.1
  Top Layer w0.254: U2.13 73.309,42.291 v1(74.93,42.291)
  Top Layer w0.635: 6.49K.1@68.707,58.42 70.104,58.42 ; U4_2.3 70.104,58.42 ; v1(78.994,46.228) 78.994,48.387 77.787,49.593 71.438,49.593 70.104,50.927 70.104,58.42
  Bottom Layer w0.381: v1(74.93,42.291) 77.597,42.291 78.994,43.688 v1(78.994,46.228)
ADC_OUTC1: 6.49K.1@40.894,33.235 U2.12 U5_1.3 | length 48.6
  Top Layer w0.254: U2.12 73.327,41.623 74.963,41.623 75.692,40.894 75.692,40.885 76.064,40.513 76.073,40.513 v1(76.708,39.878)
  Top Layer w0.508: U5_1.3 40.894,33.235 41.287,33.235 41.883,32.639 v1(54.102,32.639) ; v1(58.547,32.639) 75.692,32.639 76.708,33.655 v1(76.708,34.036)
  Bottom Layer w0.381: v1(76.708,34.036) v1(76.708,39.878)
  Bottom Layer w0.635: v1(54.102,32.639) v1(58.547,32.639)
ADC_OUTC2: 6.49K.1@54.825,58.293 U2.11 U5_2.3 | length 38.8
  Top Layer w0.381: U2.11@73.283,40.998 73.406,40.875 v1(73.406,40.005)
  Top Layer w0.508: U5_2.3@56.704,58.42 54.952,58.42 54.825,58.293 54.825,57.9 54.229,57.304 54.229,51.181 55.499,49.911 56.515,49.911 57.785,48.641 v1(58.42,48.641) ; v1(60.325,46.736) 60.325,40.513 61.595,39.243 v1(69.088,39.243)
  Bottom Layer w0.381: v1(58.42,48.641) v1(60.325,46.736) ; 68.707,39.243 v1(69.088,39.243) 72.644,39.243 v1(73.406,40.005)
GND: 0.1uF.1 1uF.1 "Pow Con.2" C1.1 C3.2 C4.1 D1.1 U1.1 U1.4 U1.7 U1.8 U2.4 U2.8 U2.17 U2.20 U3_1.6 U3_1.7 U3_1.8 U3_2.6 U3_2.7 U3_2.8 U4_1.6 U4_1.7 U4_1.8 U4_2.6 U4_2.7 U4_2.8 U5_1.6 U5_1.7 U5_1.8 U5_2.6 U5_2.7 U5_2.8 | length 61.6
  Top Layer w0.254: v1(36.867,41.058) 0.1uF.1@36.867,42.164 ; 1uF.1@36.867,43.434 1uF.1@36.957,43.524 ; v1(54.483,43.434) v1@54.61,43.561 ; U1.1@56.388,47.567 U1.1 ; C4.1@64.008,46.355 C4.1 ; 0.1uF.1@64.135,62.498 0.1uF.1@64.186,62.447 ; v1(64.135,63.373) v1@64.135,63.5 ; v1(66.167,46.228) 66.167,45.339 66.589,44.917 U2.4 ; v1(66.193,42.317) U2.8 ; 1uF.1@66.294,62.498 1uF.1@66.345,62.447 ; v1(72.009,45.466) 72.009,45.436 72.484,44.961 73.151,44.961 73.239,44.873 U2.17 ; v1@76.327,46.99 v1@76.417,47.08
  Top Layer w0.33: v1(50.8,35.052) D1.1 ; v1(72.009,46.863) 72.013,46.867 U2.20
  Top Layer w0.381: v1(35.851,52.234) 0.1uF.1@35.851,53.34 ; U5_2.8 v1(58.42,52.07)
  Top Layer w0.4: 0.1uF.1@64.135,62.498 v1(64.135,63.373) ; 1uF.1@66.294,62.498 v1(66.294,63.373)
  Top Layer w0.508: 1uF.1@30.912,60.454 v1(30.912,61.9) ; 0.1uF.1@35.851,53.34 0.1uF.1@35.851,53.594 ; C4.1@64.008,46.355 v1(64.008,47.371)
  Top Layer w0.559: U1.8 v1(64.008,47.371)
  Top Layer w0.635: v1(54.483,43.434) 0.1uF.1@54.483,44.614 ; v1@54.61,43.561 U1.4 ; U1.1@56.388,47.567 v1(56.388,48.641)
  Top Layer w0.762: U1.7 U1.8 ; v1(64.135,40.386) C3.2 ; v1@76.417,47.08 C1.1
  Top Layer w0.889: 1uF.1@30.912,60.454 30.951,60.415 0.1uF.1@32.639,60.415 ; 0.1uF.1@35.851,53.594 1uF.1@35.851,54.991 ; 0.1uF.1@36.867,42.164 1uF.1@36.867,43.434 ; U3_1.6 40.386,65.417 v1(40.386,69.596) ; U4_1.6 U4_1.7 U4_1.8 v1(48.71,46.678) ; U5_1.6 U5_1.7 U5_1.8 v1(48.964,34.994) ; U5_2.8 U5_2.7 U5_2.6 ; 63.754,35.179 v1(63.754,37.211) ; v1(72.383,50.934) U4_2.8 U4_2.7 U4_2.6 ; v1(79.629,58.293) 79.629,59.307 79.756,59.434 1uF.1@81.153,59.434 ; v1(83.959,50.846) U3_2.8 U3_2.7 U3_2.6 U3_2.6@83.959,54.61 ; v1(86.614,63.881) 87.921,63.881 0.1uF.1@87.921,62.611
  other v1: 54.483,43.434 76.454,46.99
NetC3_1: C3.1 TRIM.1 U1.5 | length 4.4
  Top Layer w0.508: U1.5@62.034,43.434 62.034,42.106 TRIM.1 ; U1.5 63.421,43.561 64.114,42.868 C3.1
NetD1_2: D1.2 R4.2 | length 1.2
  Top Layer w0.24: D1.2 R4.2
NetP3_1: "SPI Con.1" SCLK.1 U2.1 | length 37.2
  Top Layer w0.254: U2.1 68.495,46.867 70.739,44.623 70.739,44.577
  Top Layer w0.381: SCLK.1 75.692,26.289 80.416,31.013 80.416,35.941 78.003,38.354 74.041,38.354 70.739,41.656 70.739,44.577
NetP3_2: "SPI Con.2" DIN.1 U2.2 | length 31.9
  Top Layer w0.254: U2.2 67.455,46.195 68.359,46.195 69.723,44.831
  Top Layer w0.381: DIN.1 74.549,27.813 78.105,31.369 78.105,35.814 77.94,35.979 77.94,36.487 76.708,37.719 73.778,37.719 69.723,41.774 69.723,44.831
  Bottom Layer w0.381: 77.902,35.941 78.105,35.738
NetP3_3: "SPI Con.3" CS.1 U2.3 | length 25
  Top Layer w0.254: U2.3 67.999,45.567 68.043,45.523 68.134,45.523 68.77,44.887
  Top Layer w0.381: 68.77,44.887 68.77,41.828 73.515,37.084 74.244,37.084 75.387,35.941 75.311,35.865 v1(75.311,33.655) ; CS.1 73.406,29.464 v1(75.311,31.369)
  Bottom Layer w0.381: v1(75.311,31.369) v1(75.311,33.655)
NetP3_4: "SPI Con.4" DOUT.1 U2.18 | length 25.6
  Top Layer w0.254: U2.18 73.327,45.523 73.984,45.523 73.989,45.518 75.386,45.518 77.597,43.307 77.597,39.751 76.962,39.116 v1(75.81,39.116)
  Top Layer w0.381: DOUT.1@69.215,30.861 DOUT.1 72.136,30.861 v1(72.898,31.623) ; v1(72.009,37.592) 72.009,36.805 72.873,35.941 72.898,35.916 v1(72.898,33.655)
  Bottom Layer w0.381: v1(72.009,37.592) 72.044,37.627 74.321,37.627 v1(75.81,39.116) ; v1(72.898,31.623) v1(72.898,33.655)
NetP4_1_2: 
NetP4_1_3: 
NetP4_2_2: 
NetP4_2_3: 
S0_1: "Mux Select.3" pad.2 U3_1.11 U3_2.11 U4_1.11 U4_2.11 U5_1.11 U5_2.11 | length 95.4
  Top Layer w0.381: pad.2 42.291,71.374 43.688,69.977 43.688,66.929 44.704,66.929 46.101,65.532 46.101,64.516 v1(48.133,62.484) ; v1(60.198,54.61) U5_2.11 ; 65.146,54.61 65.151,54.615 ; v1(76.2,54.61) U4_2.11 ; v1(87.884,54.61) 87.884,54.561 v1@87.923,54.522
  Top Layer w0.508: U3_1.11 37.045,65.366 v1(37.064,65.385) ; v1(43.688,50.165) U4_1.11 v1(43.688,53.594) ; U5_1.11 v1(44.704,42.164) ; U5_2.11 65.146,54.61 v1(67.691,54.61) ; U4_2.11 v1(80.01,54.61) ; v1@87.923,54.522 U3_2.11
  Bottom Layer w0.381: v1(37.064,65.385) 43.668,65.385 43.688,65.405 ; v1(43.688,50.165) 44.704,49.149 v1(44.704,42.164) ; v1(43.688,53.594) 43.688,65.405 ; 43.688,66.929 43.688,65.405 ; v1(48.133,62.484) 48.133,60.579 54.229,54.483 54.356,54.61 v1(60.198,54.61)
  Bottom Layer w0.508: v1(67.691,54.61) v1(76.2,54.61) ; v1(80.01,54.61) v1(87.884,54.61)
S0_2: 
S1_1: "Mux Select.2" pad.3 U3_1.10 U3_2.10 U4_1.10 U4_2.10 U5_1.10 U5_2.10 | length 103.3
  Top Layer w0.381: 47.193,66.929 47.193,64.567 v1(49.276,62.484) ; v1(59.055,55.372) 59.055,54.483 60.198,53.34 U5_2.10
  Top Layer w0.508: U3_1.10 v1(37.045,66.636) ; pad.3 44.45,72.771 47.117,70.104 47.117,67.005 47.193,66.929 ; v1(44.958,50.038) U4_1.10 v1(44.958,53.594) ; U5_1.10 v1(45.974,42.037) ; U5_2.10@62.154,53.34 v1(67.564,53.34) ; v1(76.2,53.34) U4_2.10 v1(80.01,53.34) ; v1(87.884,53.213) 87.923,53.252 U3_2.10
  Bottom Layer w0.381: v1(37.045,66.636) 41.363,66.636 42.751,68.024 46.099,68.024 47.193,66.929 ; v1(44.958,50.038) 45.974,49.022 v1(45.974,42.037) ; v1(44.958,53.594) 44.958,62.357 47.244,64.643 47.244,66.929 ; v1(49.276,62.484) 49.276,61.087 54.991,55.372 v1(59.055,55.372)
  Bottom Layer w0.508: v1(67.564,53.34) v1(76.2,53.34) ; v1(80.01,53.34) 80.137,53.213 v1(87.884,53.213)
S1_2: 
S2_1: "Mux Select.1" pad.4 U3_1.9 U3_2.9 U4_1.9 U4_2.9 U5_1.9 U5_2.9 | length 111.6
  Top Layer w0.381: U3_1.9 37.045,67.906 v1(37.084,67.945) ; pad.4 46.609,74.168 50.673,70.104 50.673,66.929 50.698,66.929 50.698,63.221 v1(51.308,62.611) ; v1(55.499,56.515) 55.499,53.086 v1(55.626,53.086) ; v1(60.833,52.07) U5_2.9
  Top Layer w0.508: v1(46.228,50.038) U4_1.9 v1(46.228,53.594) ; U5_1.9 v1(47.244,42.037) ; U5_2.9 v1(67.564,52.07) ; v1(76.2,52.07) U4_2.9 v1(80.01,52.07) ; v1(87.884,52.07) 89.321,52.07 U3_2.9
  Bottom Layer w0.381: v1(37.084,67.945) 41.529,67.945 42.545,68.961 48.666,68.961 50.698,66.929 50.698,66.288 46.228,61.818 v1(46.228,53.594) ; v1(46.228,50.038) 46.228,49.911 47.244,48.895 v1(47.244,42.037) ; v1(51.308,62.611) 51.308,60.198 54.991,56.515 v1(55.499,56.515) ; v1(55.626,53.086) 59.944,53.086 60.833,52.197 v1(60.833,52.07)
  Bottom Layer w0.508: v1(67.564,52.07) v1(76.2,52.07) ; v1(80.01,52.07) v1(87.884,52.07)
S2_2: 
TS_IN1_1: "Therm Con 1.1" U3_1.13 | length 15.3
  Top Layer w0.254: 32.842,54.127 v1(33.807,54.127) ; U3_1.13 36.615,62.826 38.735,60.706 38.735,57.776 38.236,57.277 v1(37.338,57.277)
  Bottom Layer w0.254: v1(33.807,54.127) 34.519,54.127 37.211,56.82 37.211,57.15 v1(37.338,57.277)
TS_IN1_2: "Therm Con 2.1" U3_2.13 | length 18.5
  Top Layer w0.254: 75.35,66.994 79.573,66.994 87.757,58.81 87.757,58.801 88.011,58.547 88.011,58.039 88.988,57.062 U3_2.13
TS_IN2_1: "Therm Con 1.2" U3_1.14 | length 16.1
  Top Layer w0.254: 30.861,54.127 31.902,53.086 v1(32.893,53.086) ; U3_1.14 36.488,61.556 38.1,59.944 v1(38.1,58.039)
  Bottom Layer w0.254: v1(32.893,53.086) 34.196,53.086 38.1,56.99 v1(38.1,58.039)
TS_IN2_2: "Therm Con 2.2" U3_2.14 | length 18.5
  Top Layer w0.254: 75.35,68.975 78.31,68.975 88.265,59.02 88.265,59.011 88.944,58.332 U3_2.14
TS_IN3_1: "Therm Con 1.3" U3_1.15 | length 10.6
  Top Layer w0.254: 32.842,52.121 34.738,54.017 v1(34.738,55.245) ; U3_1.15 35.345,60.286 36.449,59.182 v1(36.449,57.277)
  Bottom Layer w0.254: v1(34.738,55.245) 36.449,56.956 v1(36.449,57.277)
TS_IN3_2: "Therm Con 2.3" U3_2.15 | length 22.2
  Top Layer w0.254: 73.344,66.994 74.295,67.946 74.295,69.208 74.937,69.85 78.223,69.85 88.471,59.602 U3_2.15
TS_IN4_1: "Therm Con 1.4" U3_1.12 | length 16.2
  Top Layer w0.254: 30.861,52.121 31.826,52.121 v1(31.877,52.07) ; v1(33.02,64.135) 34.846,64.135 U3_1.12
  Bottom Layer w0.254: 31.872,54.361 33.392,55.88 33.528,55.88 33.655,56.007 33.655,62.738 33.02,63.373 v1(33.02,64.135) ; v1@31.877,51.943 v1(31.877,52.07) 31.877,54.356
TS_IN4_2: "Therm Con 2.4" U3_2.12 | length 26
  Top Layer w0.254: 73.344,68.975 73.344,69.28 74.422,70.358 78.613,70.358 v1(86.614,62.357) ; v1(87.122,58.547) 87.122,56.642 87.972,55.792 U3_2.12 U3_2.12@89.448,55.753
  Bottom Layer w0.254: v1(86.614,62.357) 86.614,59.064 87.122,58.556 v1(87.122,58.547)
TS_IN5_1: "Therm Con 1.5" U3_1.1 | length 12.9
  Top Layer w0.254: 32.842,50.114 v1(32.842,50.876) ; v1(38.989,55.499) 40.335,56.845 U3_1.1
  Bottom Layer w0.254: v1(32.842,50.876) 37.465,55.499 v1(38.989,55.499)
TS_IN5_2: "Therm Con 2.5" U3_2.1 | length 15.8
  Top Layer w0.254: 71.337,66.994 72.164,66.167 79.248,66.167 83.693,61.722 83.693,60.872 U3_2.1 ; U3_2.1@84.328,60.96 U3_2.1@84.416,60.872
TS_IN6_1: "Therm Con 1.6" U3_1.5 | length 23.4
  Top Layer w0.254: v1(30.353,56.642) 29.21,55.499 29.21,51.308 30.404,50.114 30.861,50.114 ; v1@33.147,57.912 v1(34.798,57.912) ; v1(37.592,64.135) 40.296,64.135 U3_1.5
  Bottom Layer w0.254: v1(30.353,56.642) 31.623,57.912 v1(33.02,57.912) v1@33.147,57.912 ; v1(34.798,57.912) 34.861,57.975 35.369,57.975 37.592,60.198 v1(37.592,64.135)
TS_IN6_2: "Therm Con 2.6" U3_2.5 | length 25.4
  Top Layer w0.254: 71.337,68.975 72.847,70.485 v1(73.152,70.485)
  Top Layer w0.457: U3_2.5 85.383,55.792 86.233,56.642 v1@86.233,58.42
  Bottom Layer w0.254: v1(73.152,70.485) 75.057,70.485 86.106,59.436 86.106,58.674 v1(86.233,58.547) v1@86.233,58.42
TS_IN7_1: "Therm Con 1.7" U3_1.2 | length 17.2
  Top Layer w0.254: 32.842,48.108 32.842,48.717 35.179,51.054 v1(36.322,51.054) ; v1(38.989,54.61) 39.243,54.864 39.252,54.864 39.624,55.236 39.624,55.245 41.529,57.15 41.529,59.563 40.806,60.286 U3_1.2
  Bottom Layer w0.254: v1(36.322,51.054) 38.989,53.721 v1(38.989,54.61)
TS_IN7_2: "Therm Con 2.7" U3_2.2 | length 18.3
  Top Layer w0.254: 69.33,66.994 70.92,65.405 78.867,65.405 82.853,61.419 82.853,60.327 83.578,59.602 U3_2.2
TS_IN8_1: "Therm Con 1.8" U3_1.4 | length 23.8
  Top Layer w0.254: 30.861,48.108 31.877,49.124 31.877,50.673 31.515,51.035 30.372,51.035 29.718,51.689 29.718,54.483 v1(30.861,55.626) ; v1(33.02,57.15) v1(34.798,57.15) ; v1(38.354,62.611) 38.569,62.826 U3_1.4
  Bottom Layer w0.254: v1(30.861,55.626) 32.385,57.15 v1(33.02,57.15) ; v1(34.798,57.15) 35.306,57.15 38.354,60.198 v1(38.354,62.611)
TS_IN8_2: "Therm Con 2.8" U3_2.4 | length 24.8
  Top Layer w0.254: 69.33,68.975 70.332,69.977 v1(71.12,69.977)
  Top Layer w0.457: 85.256,57.062 85.471,57.277 v1(85.471,58.547)
  Top Layer w0.508: U3_2.4 85.256,57.062
  Bottom Layer w0.254: v1(71.12,69.977) 71.247,69.85 73.914,69.85 74.295,69.469 74.295,68.453 74.755,67.993 75.771,67.993 85.217,58.547 v1(85.471,58.547)
TS_IN9_1: "Therm Con 1.9" U4_1.13 | length 11.8
  Top Layer w0.254: 32.969,46.101 33.76,46.101 37.316,49.657 40.557,49.657 41.148,50.248 U4_1.13
TS_IN9_2: "Therm Con 2.9" U4_2.13 | length 16.2
  Top Layer w0.254: 67.324,66.994 67.324,66.661 69.85,64.135 v1(70.104,64.135) ; v1(74.549,57.277) 77.706,57.277 U4_2.13
  Bottom Layer w0.254: v1(70.104,64.135) 74.549,59.69 v1(74.549,57.277)
TS_IN10_1: "Therm Con 1.10" U4_1.14 | length 12.5
  Top Layer w0.254: 30.861,46.101 31.953,47.193 34.134,47.193 37.106,50.165 39.624,50.165 39.878,50.419 U4_1.14
TS_IN10_2: "Therm Con 2.10" U4_2.14 | length 17.9
  Top Layer w0.254: 67.324,68.975 68.326,67.973 68.326,66.548 70.104,64.77 73.279,64.77 v1(74.422,63.627) ; v1(75.819,58.547) 77.706,58.547 U4_2.14
  Bottom Layer w0.254: v1(74.422,63.627) 75.819,62.23 v1(75.819,58.547)
TS_IN11_1: "Therm Con 1.11" U4_1.15 | length 11.6
  Top Layer w0.254: 32.842,44.094 33.426,44.094 33.782,44.45 v1(33.782,44.653) ; v1(33.782,48.26) 34.483,48.26 36.896,50.673 38.227,50.673 38.608,51.054 U4_1.15@38.608,51.816
  Bottom Layer w0.254: v1(33.782,44.653) v1(33.782,48.26)
TS_IN11_2: "Therm Con 2.11" U4_2.15 | length 17.5
  Top Layer w0.254: 65.317,66.994 65.317,66.636 v1(66.802,65.151) ; v1(76.454,60.96) 76.454,60.071 76.835,59.69 U4_2.15
  Bottom Layer w0.254: v1(66.802,65.151) 74.422,65.151 76.454,63.119 v1(76.454,60.96)
TS_IN12_1: "Therm Con 1.12" U4_1.12 | length 15.8
  Top Layer w0.254: 30.861,44.094 32.055,45.288 33.401,45.288 ; 33.528,45.288 33.666,45.288 37.527,49.149 41.275,49.149 42.418,50.292 U4_1.12
TS_IN12_2: "Therm Con 2.12" U4_2.12 | length 21.3
  Top Layer w0.254: 65.317,68.975 66.294,67.999 66.294,66.802 69.596,63.5 v1(73.279,63.5) ; v1@76.327,55.88 U4_2.12
  Bottom Layer w0.254: v1(73.279,63.5) 75.057,61.722 75.057,57.785 76.2,56.642 v1(76.2,55.88)
TS_IN13_1: "Therm Con 1.13" U4_1.1 | length 7.7
  Top Layer w0.254: 32.944,42.088 34.519,42.088 34.97,42.539 34.97,45.012 36.636,46.678 U4_1.1
TS_IN13_2: "Therm Con 2.13" U4_2.1 | length 11.6
  Top Layer w0.254: 63.311,67.02 65.814,64.516 67.818,64.516 v1(69.469,62.865) ; v1(70.866,61.468) 71.374,60.96 U4_2.1
  Bottom Layer w0.254: v1(69.469,62.865) v1(70.866,61.468)
TS_IN14_1: "Therm Con 1.14" U4_1.5 | length 16.7
  Top Layer w0.254: 30.836,42.088 32.004,43.256 33.782,43.256 34.462,43.936 34.462,45.366 37.737,48.641 41.783,48.641 42.418,48.006 U4_1.5
TS_IN14_2: "Therm Con 2.14" U4_2.5 | length 20.1
  Top Layer w0.254: v1(67.183,57.785) 67.183,56.261 v1(67.564,55.88) ; v1(70.993,55.88) U4_2.5
  Top Layer w0.381: 63.311,69.001 63.968,69.001 64.389,68.58 v1(64.389,67.922)
  Bottom Layer w0.254: v1(64.389,67.922) 64.389,66.548 67.183,63.754 v1(67.183,57.785) ; v1(67.564,55.88) v1(70.993,55.88)
TS_IN15_1: "Therm Con 1.15" U4_1.2 | length 10.3
  Top Layer w0.254: 32.944,40.081 34.798,40.081 35.986,41.269 35.986,44.092 36.011,44.092 36.011,44.117 36.234,44.34 36.72,44.34 38.608,46.228 U4_1.2
TS_IN15_2: "Therm Con 2.15" U4_2.2 | length 14.5
  Top Layer w0.254: 61.304,67.02 61.304,66.331 63.627,64.008 67.056,64.008 v1(68.199,62.865) ; v1(70.739,60.325) 71.374,59.69 U4_2.2
  Bottom Layer w0.254: v1(68.199,62.865) v1(70.739,60.325)
TS_IN16_1: "Therm Con 1.16" U4_1.4 | length 16.3
  Top Layer w0.254: 30.836,40.081 30.988,40.081 32.131,41.224 34.671,41.224 35.478,42.031 35.478,44.302 v1(36.355,45.179) ; v1(38.989,48.006) 39.116,48.133 40.767,48.133 41.148,47.752 U4_1.4
  Bottom Layer w0.254: v1(36.355,45.179) 36.355,45.306 38.989,47.94 v1(38.989,48.006)
TS_IN16_2: "Therm Con 2.16" U4_2.4 | length 19.9
  Top Layer w0.254: 61.304,69.001 62.357,67.948 62.357,66.548 v1(63.754,65.151) ; v1(70.993,57.023) 71.12,57.15 U4_2.4
  Bottom Layer w0.254: v1(63.754,65.151) 63.754,64.77 65.024,63.5 65.024,58.715 66.716,57.023 v1(70.993,57.023)
TS_IN17_1: "Therm Con 1.17" U5_1.13 | length 11.3
  Top Layer w0.254: 32.969,38.075 34.392,38.075 34.798,38.481 v1(36.322,38.481) ; v1(42.164,38.608) U5_1.13
  Bottom Layer w0.254: v1(36.322,38.481) 42.037,38.481 v1(42.164,38.608)
TS_IN17_2: "Therm Con 2.17" U5_2.13 | length 14.2
  Top Layer w0.254: 59.297,66.994 59.371,66.994 v1(62.992,63.373) ; U5_2.13@62.154,57.15 64.135,57.15 v1@64.262,57.023
  Bottom Layer w0.254: v1(62.992,63.373) 63.246,63.119 63.246,58.166 v1(64.262,57.15) v1@64.262,57.023
TS_IN18_1: "Therm Con 1.18" U5_1.14 | length 11.6
  Top Layer w0.254: 30.861,38.075 31.902,39.116 36.208,39.116 v1(36.392,39.3) ; v1(40.824,39.3) 40.894,39.37 U5_1.14